# Altium PCB Accumulator_Indicator.PcbDoc
Units mm, origin at the board's own origin, x right, y up, seen from the top; angles counter-clockwise.
Board outline 50 x 50 mm, 2 copper layers (Top Layer, Bottom Layer), stack 1.57 mm thick; 19 components, 8 nets, 36 pads, 10 vias.
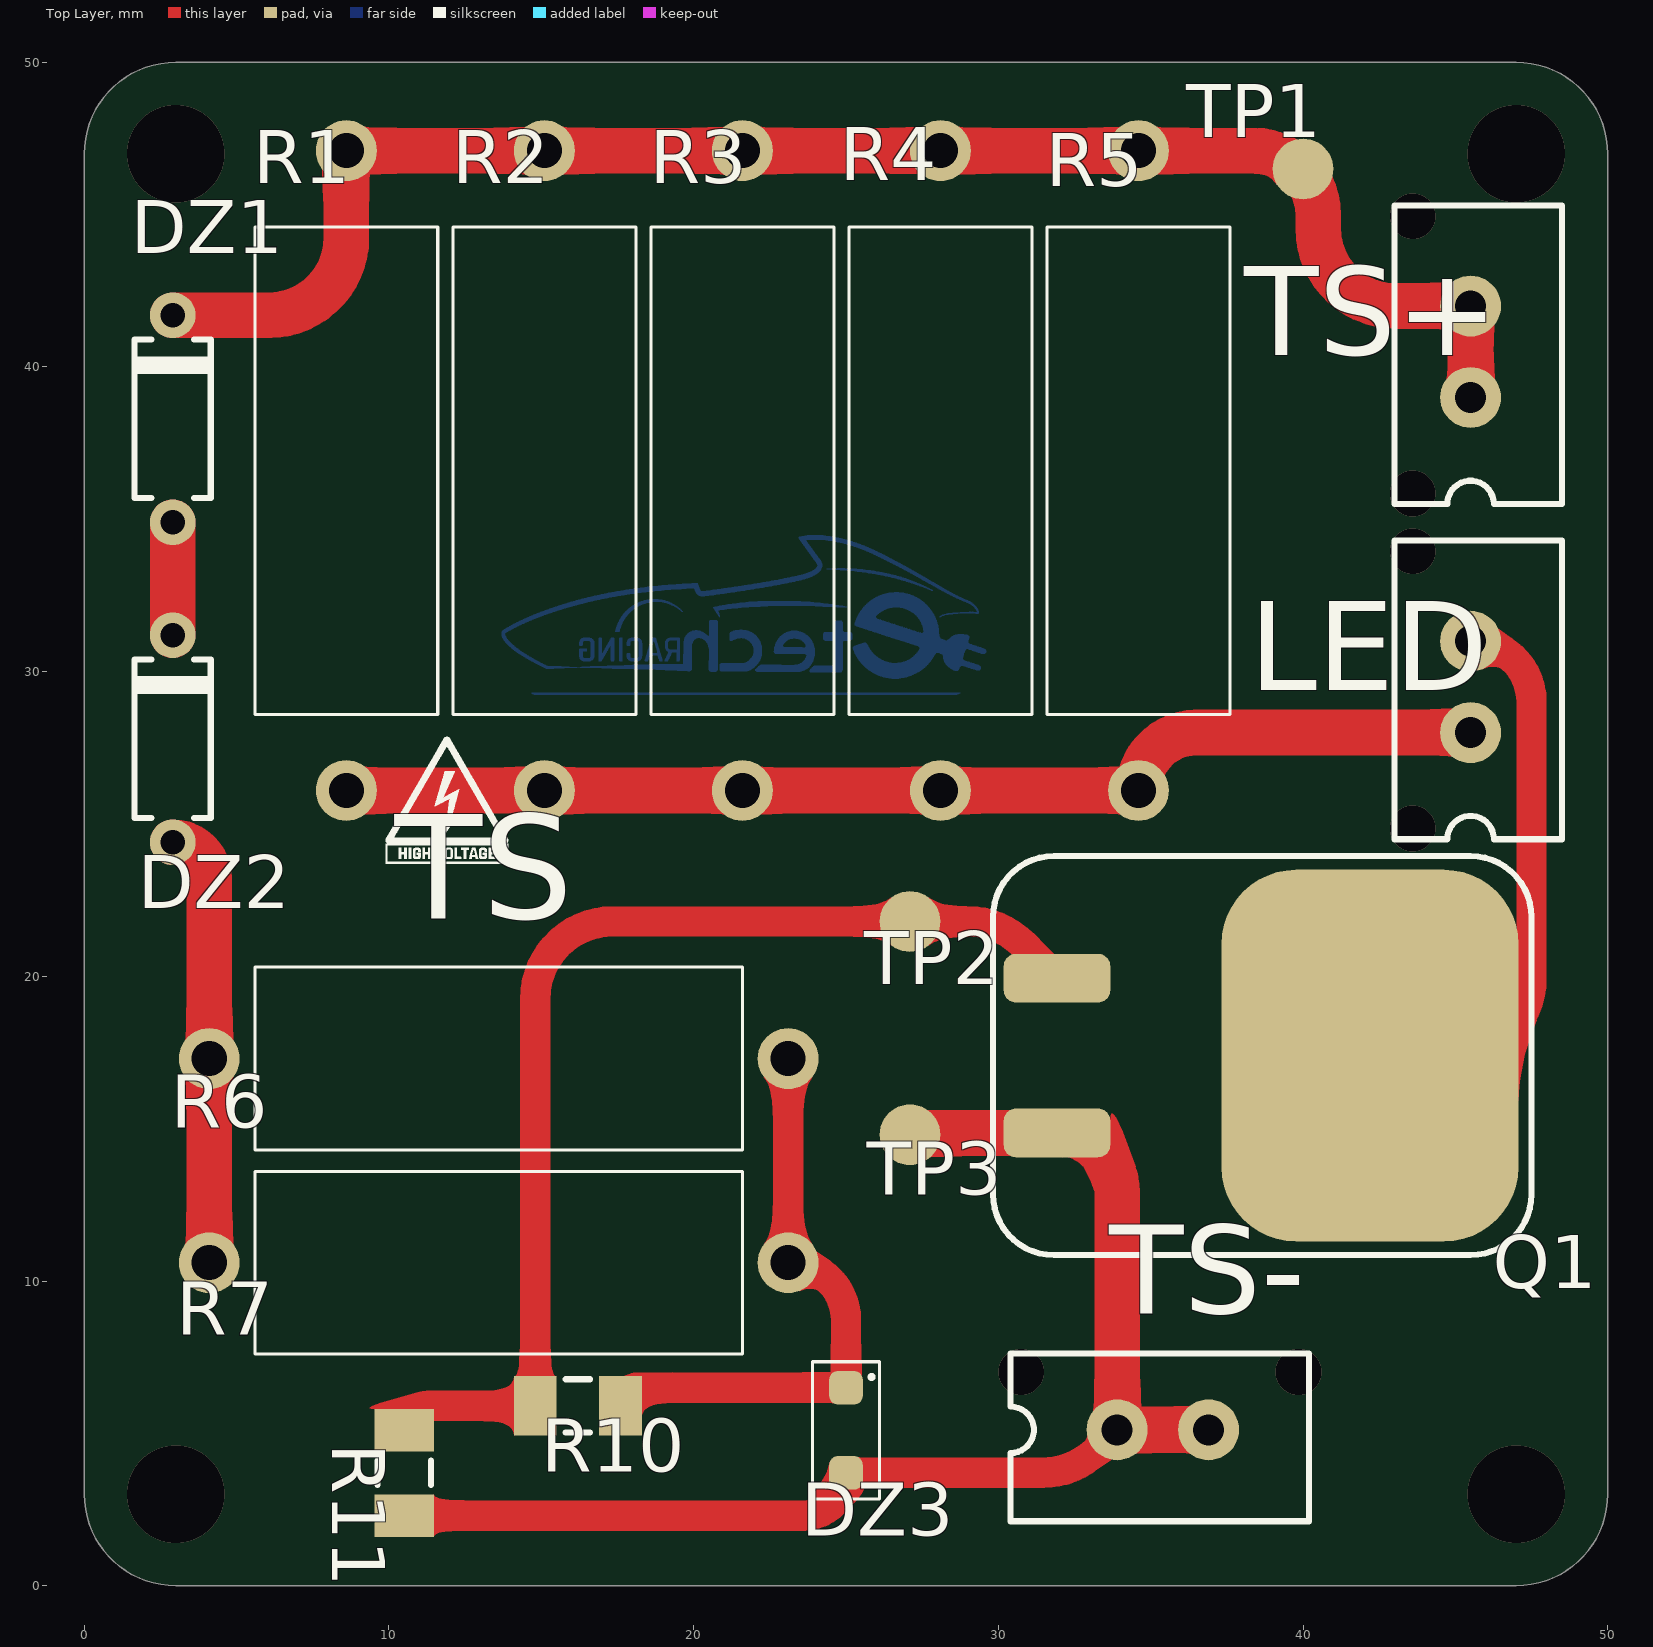
[diagram p0: Top Layer view]
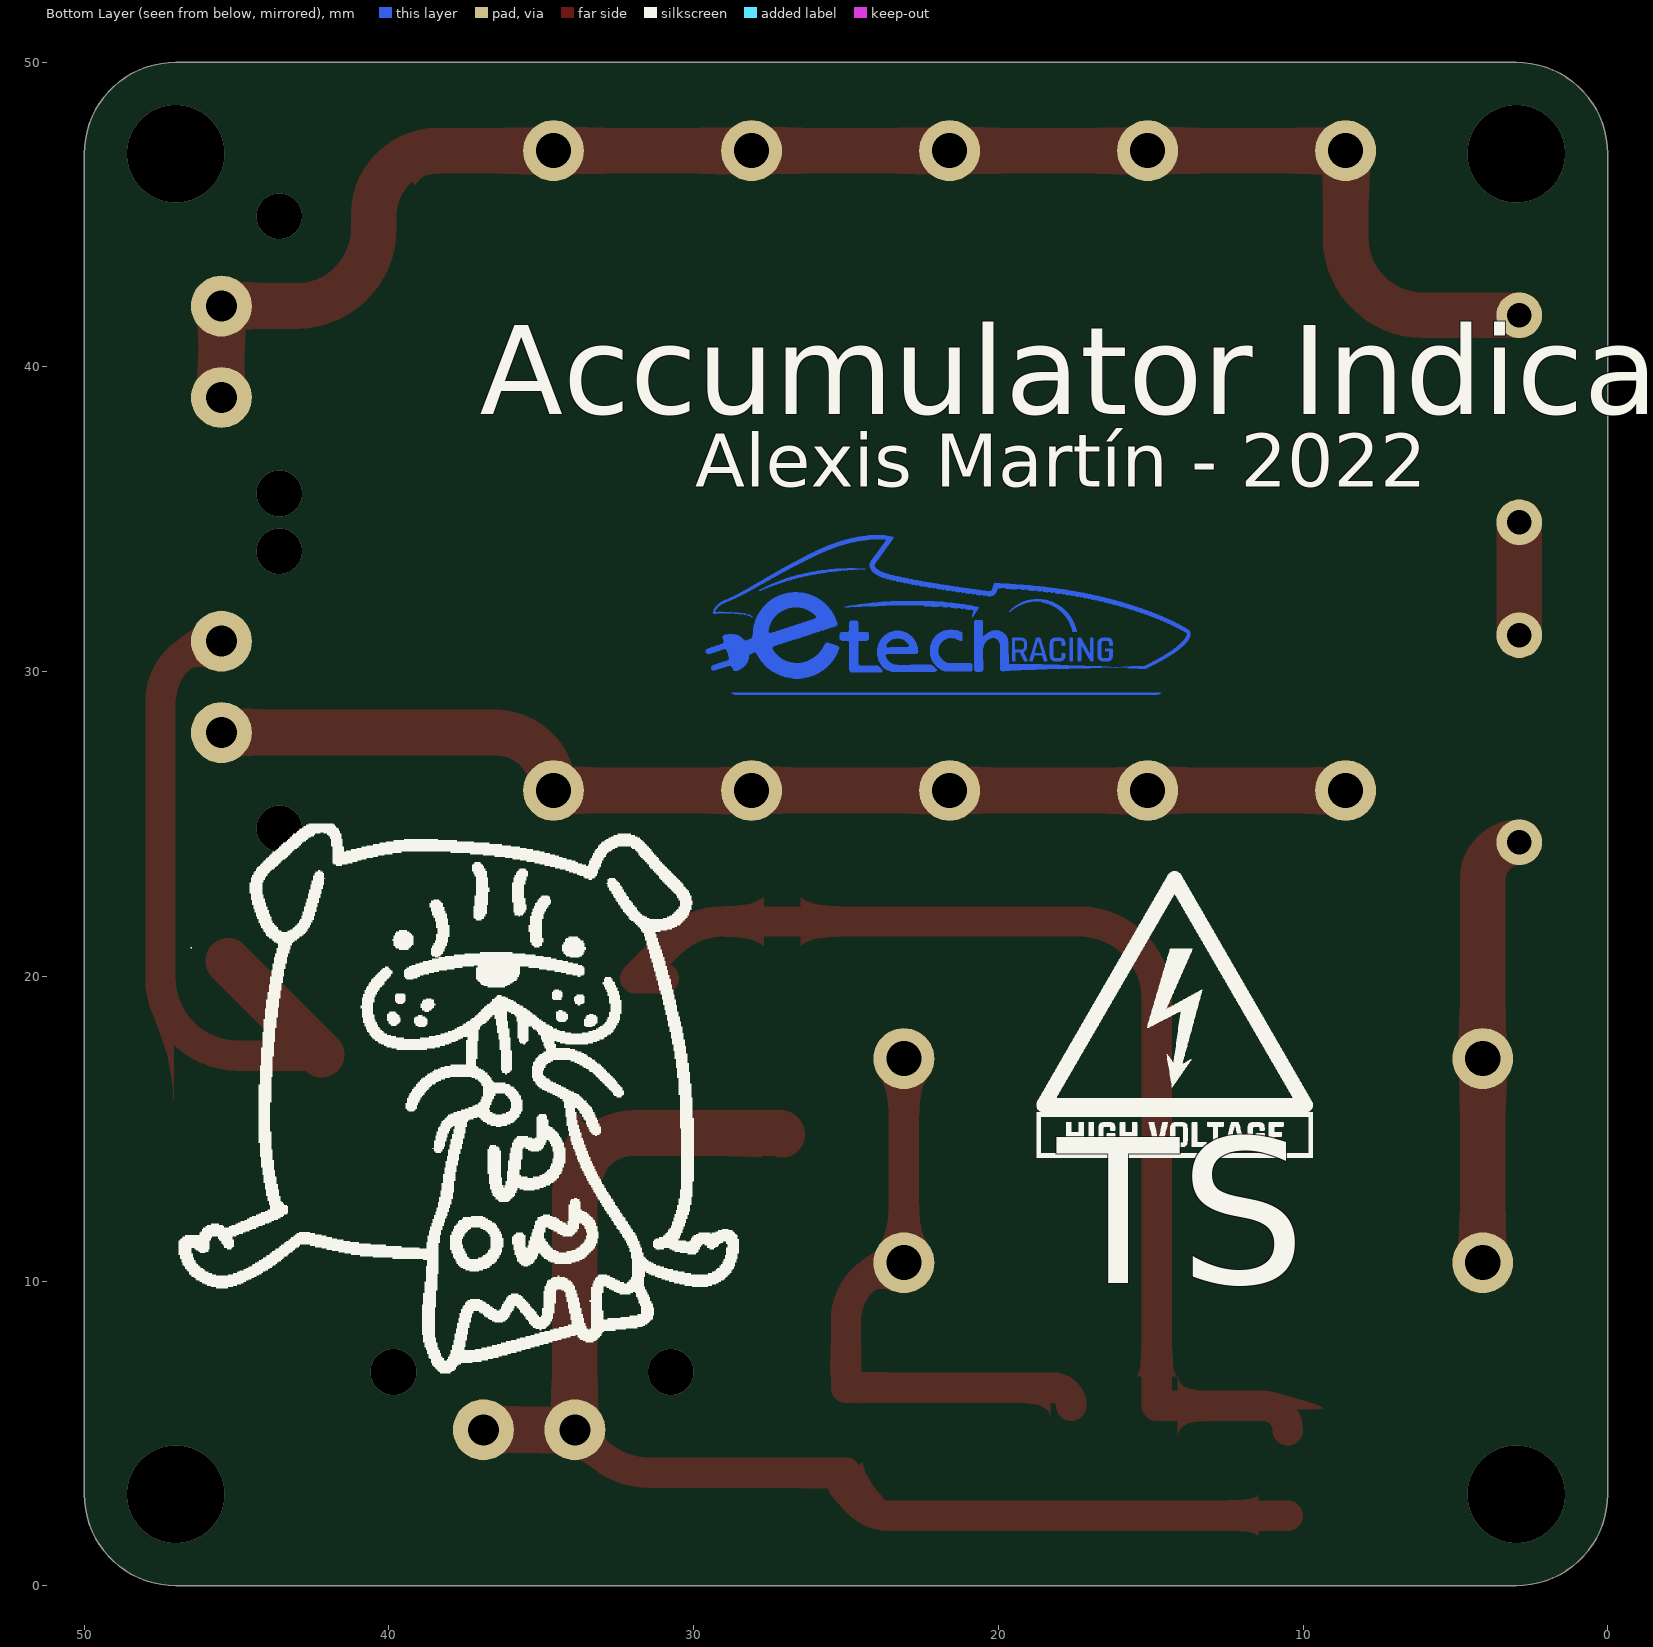
[diagram p1: Bottom Layer view, seen from below]

## Layer stack, top to bottom
Top Solder: solder mask 0.01, Solder Resist, Dk 3.5
Top Layer: signal copper 0.035
Dielectric 1: dielectric 1.5, FR-4, Dk 4.8
Bottom Layer: signal copper 0.035
Bottom Solder: solder mask 0.01, Solder Resist, Dk 3.5

## Board outline
0,3 0,47 cw(c3,47) 3,50 47,50 cw(c47,47) 50,47 50,3 cw(c47,3) 47,0 3,0 cw(c3,3)

## Design rules (kind name [scope] priority, off if disabled: settings)
Clearance [All] p1: gap=0.254 ignorepadtopadclearanceinfootprint=FALSE except(0: Arc-Hole Track-Hole SMDPad-Hole THPad-Hole Via-Hole Fill-Hole Poly-Hole Region-Hole Text-Hole)
PolygonConnect [All] p1: connectstyle=Relief reliefconductorwidth=0.254 reliefentries=4 polygonreliefangle="90 Angle" airgapwidth=0.254
RoomDefinition Accumulator_Indicator_22-12 [InComponentClass('Accumulator_Indicator_22-12')] p1: confinementstyle=ConfineIn formatcopy=TRUE lockcomponents=FALSE outline 0,0 52.9,0 52.9,52.1 0,52.1
RoutingVias [All] p1: holewidth=0.711 width=1.27 viastyle="Through Hole" minholewidth=0.711 minwidth=1.27 maxholewidth=0.711 maxwidth=1.27
SolderMaskExpansion [All] p1: expansion=0.102 istentingtop=FALSE
Width [All] p1: maxlimit=5 minlimit=0.1 preferedwidth=0.5
30 further rules are at their usual default settings.

## Components (designator, comment, footprint, x,y, rotation, side; value= is the part's Value field where it differs from the comment)
DZ1 "24V" DZ_24V_STD 2.9,38.3 r270 top
DZ2 "24V" DZ_24V_STD 2.9,27.8 r270 top
DZ3 "10V" DZ_24V_BZT52H-A10-Q 25,5.1 r270 top
LED "436500215" J_MicroFit_2x1 45.5,28 r270 top
Q1 "D2PAK type-A" MOSFET-N-D2PAK 42.2,17.4 r270 top
R1 "130Ω" R130K_3W413 8.6,36.6 r90 top
R2 "130Ω" R130K_3W413 15.1,36.6 r90 top
R3 "130Ω" R130K_3W413 21.6,36.6 r90 top
R4 "130Ω" R130K_3W413 28.1,36.6 r90 top
R5 "130Ω" R130K_3W413 34.6,36.6 r90 top
R6 "200Ω" R200K_2W 13.6,17.3 r180 top
R7 "200Ω" R200K_2W 13.6,10.6 r180 top
R10 "CRG1206F100R" R1206FTK-W 16.2,5.9 r180 top
R11 "CRCW120610K0FKEA" R1206FTK-W 10.5,3.7 r270 top
TP1 "TestPoint" TestPoint#1 40,46.5 r270 top
TP2 "TestPoint" TestPoint#2 27,21.8 r0 top
TP3 "TestPoint" TestPoint#1 27.1,14.8 r0 top
TS+ "436500215" J_MicroFit_2x1 45.5,39 r270 top
TS- "436500215" J_MicroFit_2x1 33.9,5.116 r180 top

## Footprints (in the part's own frame and the unit in brackets; to place one, negate y for a bottom-side part, rotate by r counter-clockwise, add the part's x,y. Pads: shape width x height; smd on the part's side, far side on the other; paste and mask are expansions set on the pad)
DZ_24V_BZT52H-A10-Q [mm]
  rrect50% 1.1x1.1 smd: A(1.397,0) K(-1.397,0)
  silkscreen extent -2.25,-1.1 2.25,1.1, body extent -1.35,-0.85 1.35,0.85, height 1.21
DZ_24V_STD [mm]
  round 1.5 hole 0.8: A(3.4,0) K(-3.4,0)
  silkscreen extent -2.6,-1.25 2.6,1.25, body extent -1.95,-1.71 1.95,1.71, height 3.61
J_MicroFit_2x1 [mm]
  round 2 hole 1.02: 1(0,0) 2(-3,0)
  silkscreen extent -6.3,-2.5 3.5,3, body extent -6.32,-2.47 3.32,3.1, height 10
MOSFET-N-D2PAK [mm] "D2PAK type-A"
  rrect50% 12.2x9.75 smd: D(0,0)
  rrect50% 1.6x3.5 smd: G(-2.54,-10.275) S(2.54,-10.275)
  silkscreen extent -6.55,-12.37 6.55,5.3, body extent -5.28,-11.45 5.28,4.15, height 4.56
R130K_3W413 [mm]
  round 2 hole 1.15: 1(10.5,0) 2(-10.5,0)
  silkscreen extent -8,-3 8,3, body extent -10.5,-3 10.5,3, height 7
R200K_2W [mm]
  round 2 hole 1.15: 1(9.5,0) 2(-9.5,0)
  silkscreen extent -8,-3 8,3, body extent -9.5,-2.75 9.5,2.75, height 6.25
R1206FTK-W [mm] "Chip Resistor, 2-Leads, Body 3,15x1,60mm, IPC Medium Density"
  rect 1.4x1.95 smd: 1(-1.4,0) 2(1.4,0)
  silkscreen extent -0.4,-0.87 0.4,0.87, body extent -1.58,-0.8 1.58,0.8, height 0.61
TestPoint#1 [mm]
  round 2 smd: 1(0,0)
TestPoint#2 [mm]
  round 2 smd: 1(0.1,0)

## Part data
DZ1 DZ2: library part DZ_24V_STD, "BZX55C24"
DZ3: library part DZ_24V_BZT52H-A10-Q
LED TS+ TS-: library part J_MicroFit_2x1, "Header 1 Row Vertical Polarizing Peg 2 Pin SMT/Glow Wire Compatible Tin Plate", Manufacturer 1=Molex, Manufacturer Part Number 1=43650-0215, Category="Headers and Wire Housings", ComponentLink1Description=https://datasheet.ciiva.com/19462/884109-19462034.pdf?src-supplier=Jameco, ComponentLink1URL=https://datasheet.ciiva.com/19462/884109-19462034.pdf?src-supplier=Jameco, ComponentLink2Description=https://datasheet.ciiva.com/5157/0436500215-pcb-headers-148687-5157608.pdf?src-supplier=Mouser, ComponentLink2URL=https://datasheet.ciiva.com/5157/0436500215-pcb-headers-148687-5157608.pdf?src-supplier=Mouser, ComponentLink3Description=https://datasheet.ciiva.com/16085/0436500215-pcb-headers-16085668.pdf?src-supplier=Onlinecomponents.com, ComponentLink3URL=https://datasheet.ciiva.com/16085/0436500215-pcb-headers-16085668.pdf?src-supplier=Onlinecomponents.com, ComponentLink4Description=https://datasheet.ciiva.com/11748/0900766b80307ce2-11748388.pdf?src-supplier=RSComponents, ComponentLink4URL=https://datasheet.ciiva.com/11748/0900766b80307ce2-11748388.pdf?src-supplier=RSComponents, ComponentLink5Description=https://datasheet.ciiva.com/9432/0436500215-pcb-headers-9432850.pdf?src-supplier=Avnet, ComponentLink5URL=https://datasheet.ciiva.com/9432/0436500215-pcb-headers-9432850.pdf?src-supplier=Avnet, ComponentLink6Description=https://datasheet.ciiva.com/7920/1889390-7920892.pdf?src-supplier=Element14, ComponentLink6URL=https://datasheet.ciiva.com/7920/1889390-7920892.pdf?src-supplier=Element14, Pricing 1="1=0,87800, 10=0,74400, 80=0,63070, 3264=0,47000, 6528=0,45100, 13056=0,41760 (USD)", RoHS=Yes, Stock 1=11086, Supplier 1="Arrow Electronics", Supplier Part Number 1=43650-0215
Q1: library part MOSFET-N-D2PAK, "STB36N60M6"
R1 R2 R3 R4 R5: library part R130K_3W413
R6 R7: library part R200K_2W
R10: library part R100-1206FTK, "Res Thick Film 1206 100 Ohm 1% 0.25W(1/4W) ±200ppm/C Pad SMD T/R", Case Code (Imperial)=1206, Case Code (Metric)=3216, Manufacturer="TE Connectivity", Max Operating Temperature=125°C, Max power dissipation=250mW, Min Operating Temperature=-55°C, Number of Resistors=1, Package Quantity=5000, Resistance=100R, Resistor Type="Thick Film", Supplier Part Number 1=A106068CT-ND, Temperature Coefficient=200ppm/°C, Tolerance=1%, Voltage Rating=200V, .Creator=AC, Case/Package=1206, Category=Resistor, ComponentLink1Description=Datasheet, ComponentLink1URL=https://docs.rs-online.com/7aab/0900766b815b7339.pdf, ComponentLink2Description="Where buy it", ComponentLink2URL=https://es.rs-online.com/web/p/resistencias-de-montaje-en-superficie/2232120, ComponentLink3Description=https://datasheet.ciiva.com/11808/0900766b800a696e-11808648.pdf?src-supplier=RSComponents, ComponentLink3URL=https://datasheet.ciiva.com/11808/0900766b800a696e-11808648.pdf?src-supplier=RSComponents, ComponentLink4Description=https://datasheet.ciiva.com/16763/70063020-16763547.pdf?src-supplier=Allied+Electronics, ComponentLink4URL=https://datasheet.ciiva.com/16763/70063020-16763547.pdf?src-supplier=Allied+Electronics, ComponentLink5Description=https://datasheet.ciiva.com/5562/eng-ds-1773204-g-5562604.pdf?src-supplier=Mouser, ComponentLink5URL=https://datasheet.ciiva.com/5562/eng-ds-1773204-g-5562604.pdf?src-supplier=Mouser, Depth=1.55mm, ELV=Compliant, Height=0.55mm, Length=3.1mm, Manufacturer part number=CRG1206F100R, Mount="Surface Mount", Number of Terminations=2, Packaging="Tape and Reel", Power rating=250mW, Pricing 1="1=0,10000, 10=0,07600, 100=0,02920, 1000=0,01285, 2500=0,01110 (USD)", Radiation Hardening=No, RoHS=Yes, RoHS Compliant=Yes, Series="CRG, Neohm", Stock 1=13476, Supplier 1=Digi-Key, Technology="THICK FILM", Termination=Solder, Weight=0.000571oz, Width=1.55mm
R11: library part R51k-1206FTK, "Res Thick Film 1206 51K Ohm 1% 1/4W ±100ppm/°C Molded SMD SMD Punched Carrier T/R", Case Code (Imperial)=1206, Case Code (Metric)=3216, Current Rating=2A, Manufacturer=Panasonic, Manufacturer part number=ERJ-S08F5102V, Max Operating Temperature=155°C, Max power dissipation=250mW, Min Operating Temperature=-55°C, Package Quantity=5000, Resistance=51kR, Resistor Type="Thick Film", Supplier Part Number 1=667-ERJ-S08F5102V, Temperature Coefficient=100ppm/°C, Tolerance=1%, Voltage Rating=150V, Voltage Rating (DC)=200V, .Creator=DO, Case/Package=1206, Category=Resistor, ComponentLink1Description=Datasheet, ComponentLink1URL=https://docs.rs-online.com/bca8/A700000006404581.pdf, ComponentLink2Description="Where buy it", ComponentLink2URL=https://es.rs-online.com/web/p/resistencias-de-montaje-en-superficie/6791765, ComponentLink3Description=https://datasheet.ciiva.com/24023/aoa0000ce5-24023518.pdf?src-supplier=Mouser, ComponentLink3URL=https://datasheet.ciiva.com/24023/aoa0000ce5-24023518.pdf?src-supplier=Mouser, ComponentLink4Description=https://datasheet.ciiva.com/9189/aoa0000ce5-9189211.pdf?src-supplier=Avnet, ComponentLink4URL=https://datasheet.ciiva.com/9189/aoa0000ce5-9189211.pdf?src-supplier=Avnet, Construction=Rectangular, Contact Plating=Tin, Depth=1.6mm, Features=Anti-Sulfur, Height=0.028inch, Lead Free="Lead Free", Length=3.2mm, Military Standard=Not, Mount="Surface Mount", Number of Terminations=2, Packaging="Tape and Reel", Power rating=250mW, Pricing 1="1=0,31000, 10=0,26700, 50=0,26700, 100=0,10700, 1000=0,05100, 10000=0,03400 (USD)", RoHS=Yes, RoHS Compliant=Yes, Series=ERJ, Stock 1=4091, Supplier 1=Mouser, Width=0.063inch
TP1 TP2 TP3: "Test Point 1x1 mm", .Creator=GP, .PCBcheck=GP, .SCHcheck=GP, Category=TestPoint

## Via types
v1: diameter 1.5, hole 1.5, Top Layer to Bottom Layer, 6 vias
v2: diameter 3.2, hole 3.2, Top Layer to Bottom Layer, 4 vias

## Nets (pads, with @x,y where several pads share a name; then routed paths per layer and width w, separated by ;. In a path a pad name is that pad's centre, name@x,y a point inside that pad or via, vN(x,y) a via of type N, cw(c..) or ccw(c..) an arc to the next point about the centre after c; other vN are vias at no path point)
NetDZ1_A: DZ1.A DZ2.K | length 3.7
  Top Layer w1.5: DZ2.K DZ1.A
NetDZ2_A: DZ2.A R6.1 R7.1 | length 14.5
  Top Layer w1.5: DZ2.A cw(c2.9,23.2) 4.1,23.2 R6.1 R7.1
NetDZ3_K: DZ3.K R6.2 R7.2 R10.1 | length 19.6
  Top Layer w1: R10.1 cw(c18.197,5.9) 18.197,6.497 DZ3.K 25,8.7 ccw(c23.1,8.7) R7.2 R6.2
NetLED_1: LED.1 R1.2 R2.2 R3.2 R4.2 R5.2 | length 38
  Top Layer w1.5: R1.2 R2.2 R3.2 R4.2 R5.2 cw(c36.5,26.1) 36.5,28 LED.1
NetLED_2: LED.2 Q1.D | length 23.3
  Top Layer w1: Q1.D 44.96,17.4 ccw(c44.96,19.94) 47.5,19.94 47.5,29 ccw(c45.5,29) LED.2
  Top Layer w1.5: Q1.D@42.204,17.425 Q1.D@45.28,20.501
NetQ1_G: Q1.G R10.2 R11.1 TP2.1 | length 38.3
  Top Layer w1: R11.1 cw(c11.3,5.1) 11.3,5.9 R10.2 14.8,19.26 cw(c17.34,19.26) 17.34,21.8 TP2.1 29.013,21.8 cw(c29.013,19.26) 30.809,21.056 Q1.G Q1.G@30.975,19.94
TS+: DZ1.K R1.1 R2.1 R3.1 R4.1 R5.1 TP1.1 TS+.1 TS+.2 | length 53
  Top Layer w1.5: DZ1.K 6.06,41.7 ccw(c6.06,44.24) 8.6,44.24 R1.1 R2.1 R3.1 R4.1 R5.1 38.4,47.1 cw(c38.4,45) 40.5,45 40.5,44.54 ccw(c43.04,44.54) 43.04,42 TS+.2 TS+.1
TS-: DZ3.A Q1.S R11.2 TP3.1 TS-.1 TS-.2 | length 43.4
  Top Layer w1: R11.2 23.6,2.3 ccw(c23.6,3.7) 25,3.7 DZ3.A 31.435,3.703 ccw(c31.435,6.243) 33.231,4.447 TS-.1
  Top Layer w1.5: TP3.1 cw(c27.16,14.8) 27.16,14.86 Q1.S cw(c31.925,12.885) 33.9,12.885 TS-.1 TS-.2
copper on no net:
  other v1: 30.75,7.016 39.85,7.016 43.6,24.85 43.6,33.95 43.6,35.85 43.6,44.95
  other v2: 3,3 47,3 3,47 47,47

## Other copper
Bottom Layer:
  drawing of 15 lines, arcs and shapes, not listed

## Silkscreen, mask and mechanical layers (free items; w line width, h text height)
Top Overlay:
  drawing of 13 lines, arcs and shapes, not listed
  text "TS" at 10.194,20.754 h5.89
Bottom Overlay:
  drawing of 33 lines, arcs and shapes, not listed
  text "Accumulator Indicator" at 37.014,37.5 h5
  text "Alexis Martín - 2022" at 29.941,35.5 h3
  text "TS" at 18.065,7.404 h13.3
Mechanical 1:
  the board outline again, w0.5